# Altium PCB OSSI-1 Z Panel.PcbDoc
Units mil, origin at the board's own origin, x right, y up, seen from the top; angles counter-clockwise.
Board outline 3701 x 3701 mil, 2 copper layers (Top, Bottom), stack 61.811 mil thick; 41 components, 29 nets, 89 pads, 17 vias.
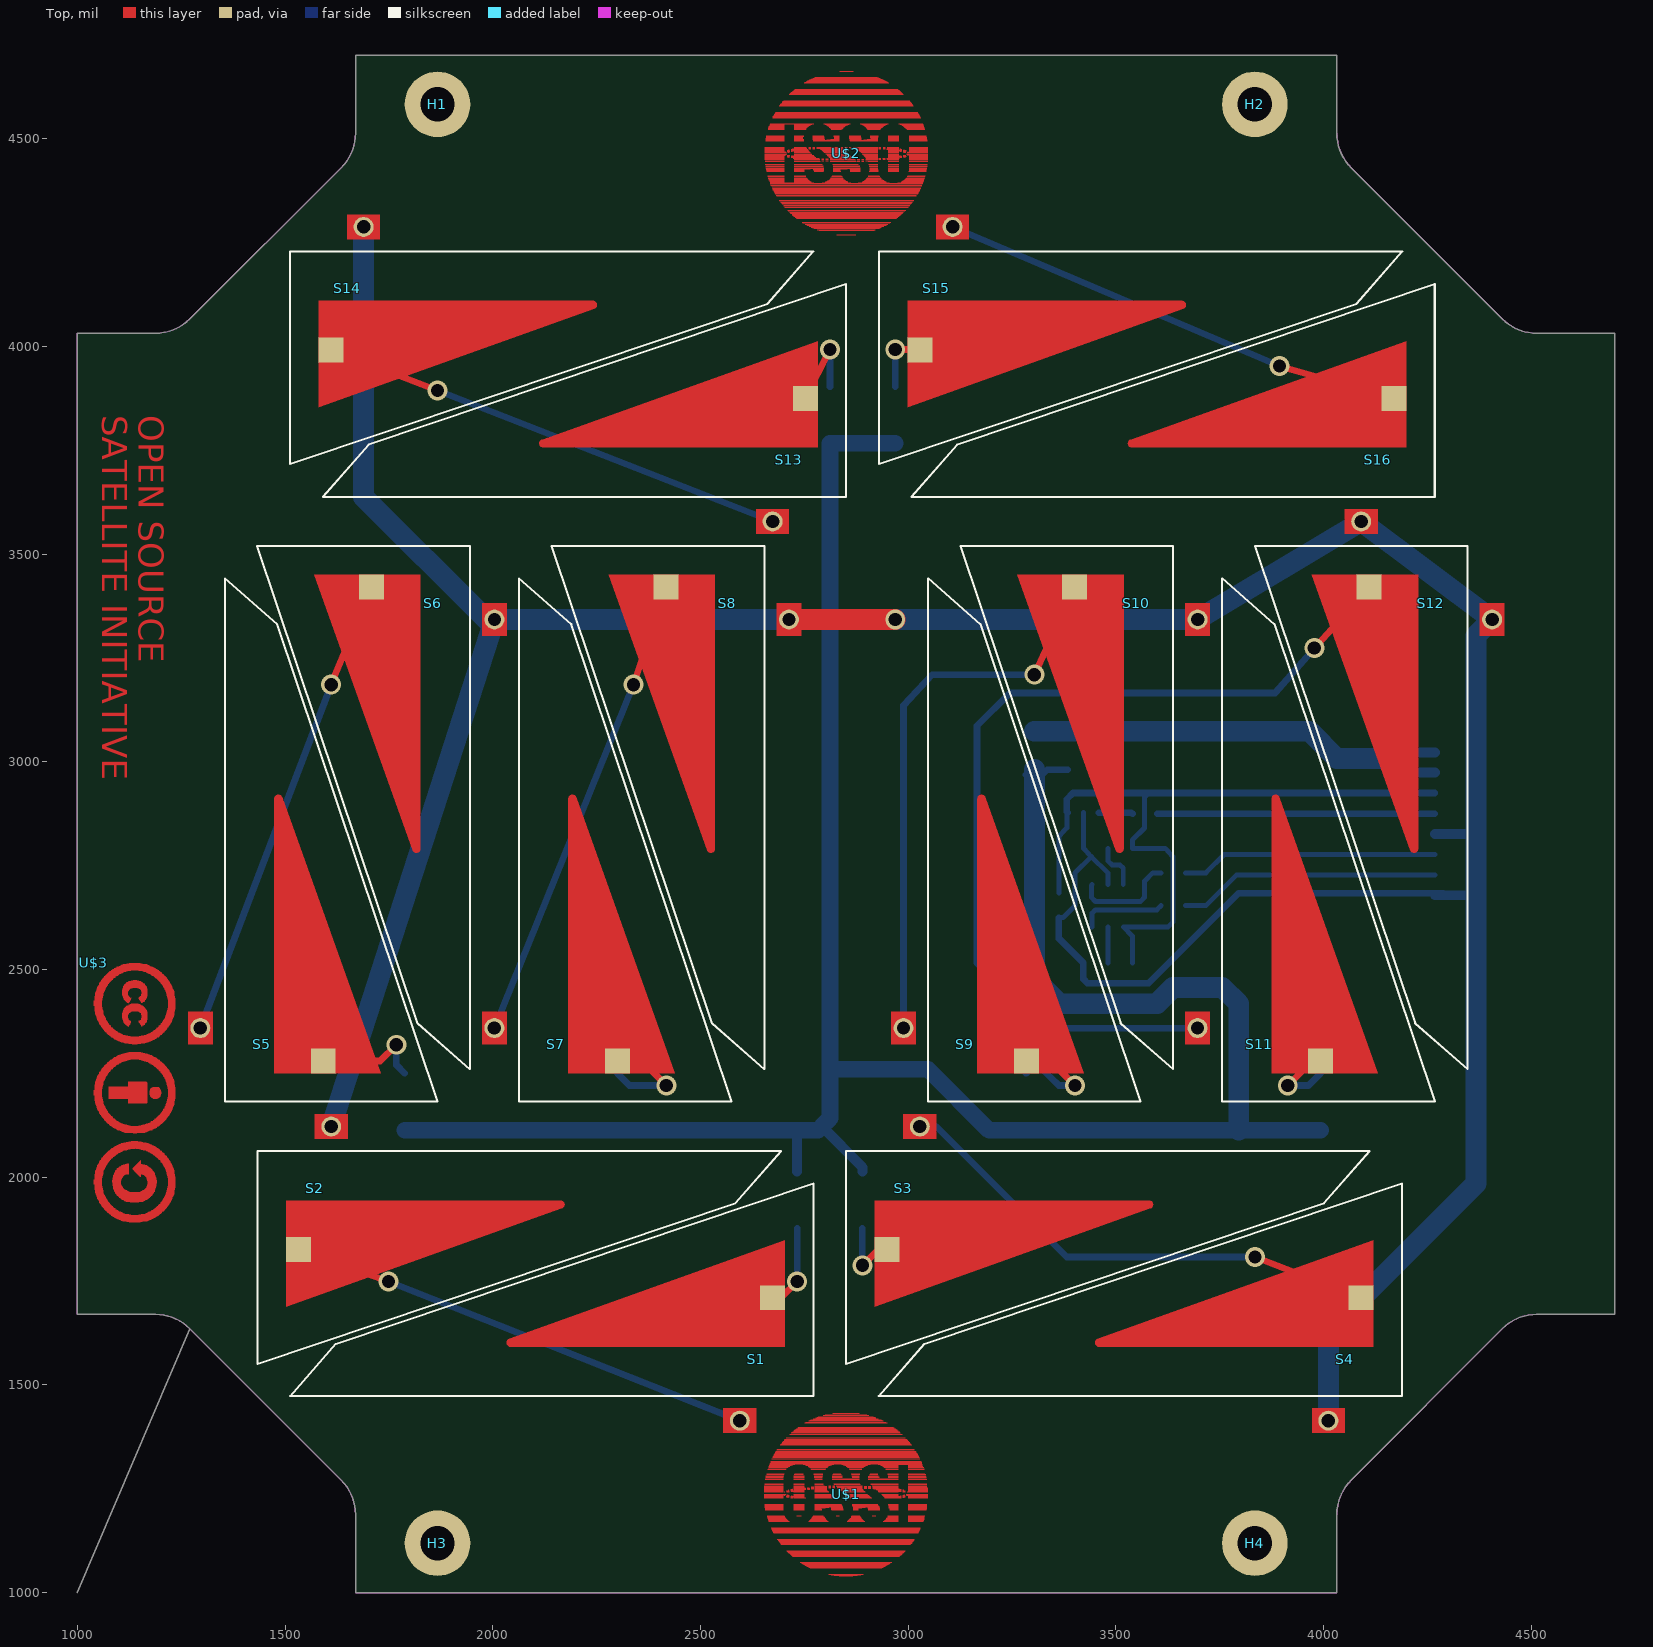
[diagram p0: Top view]
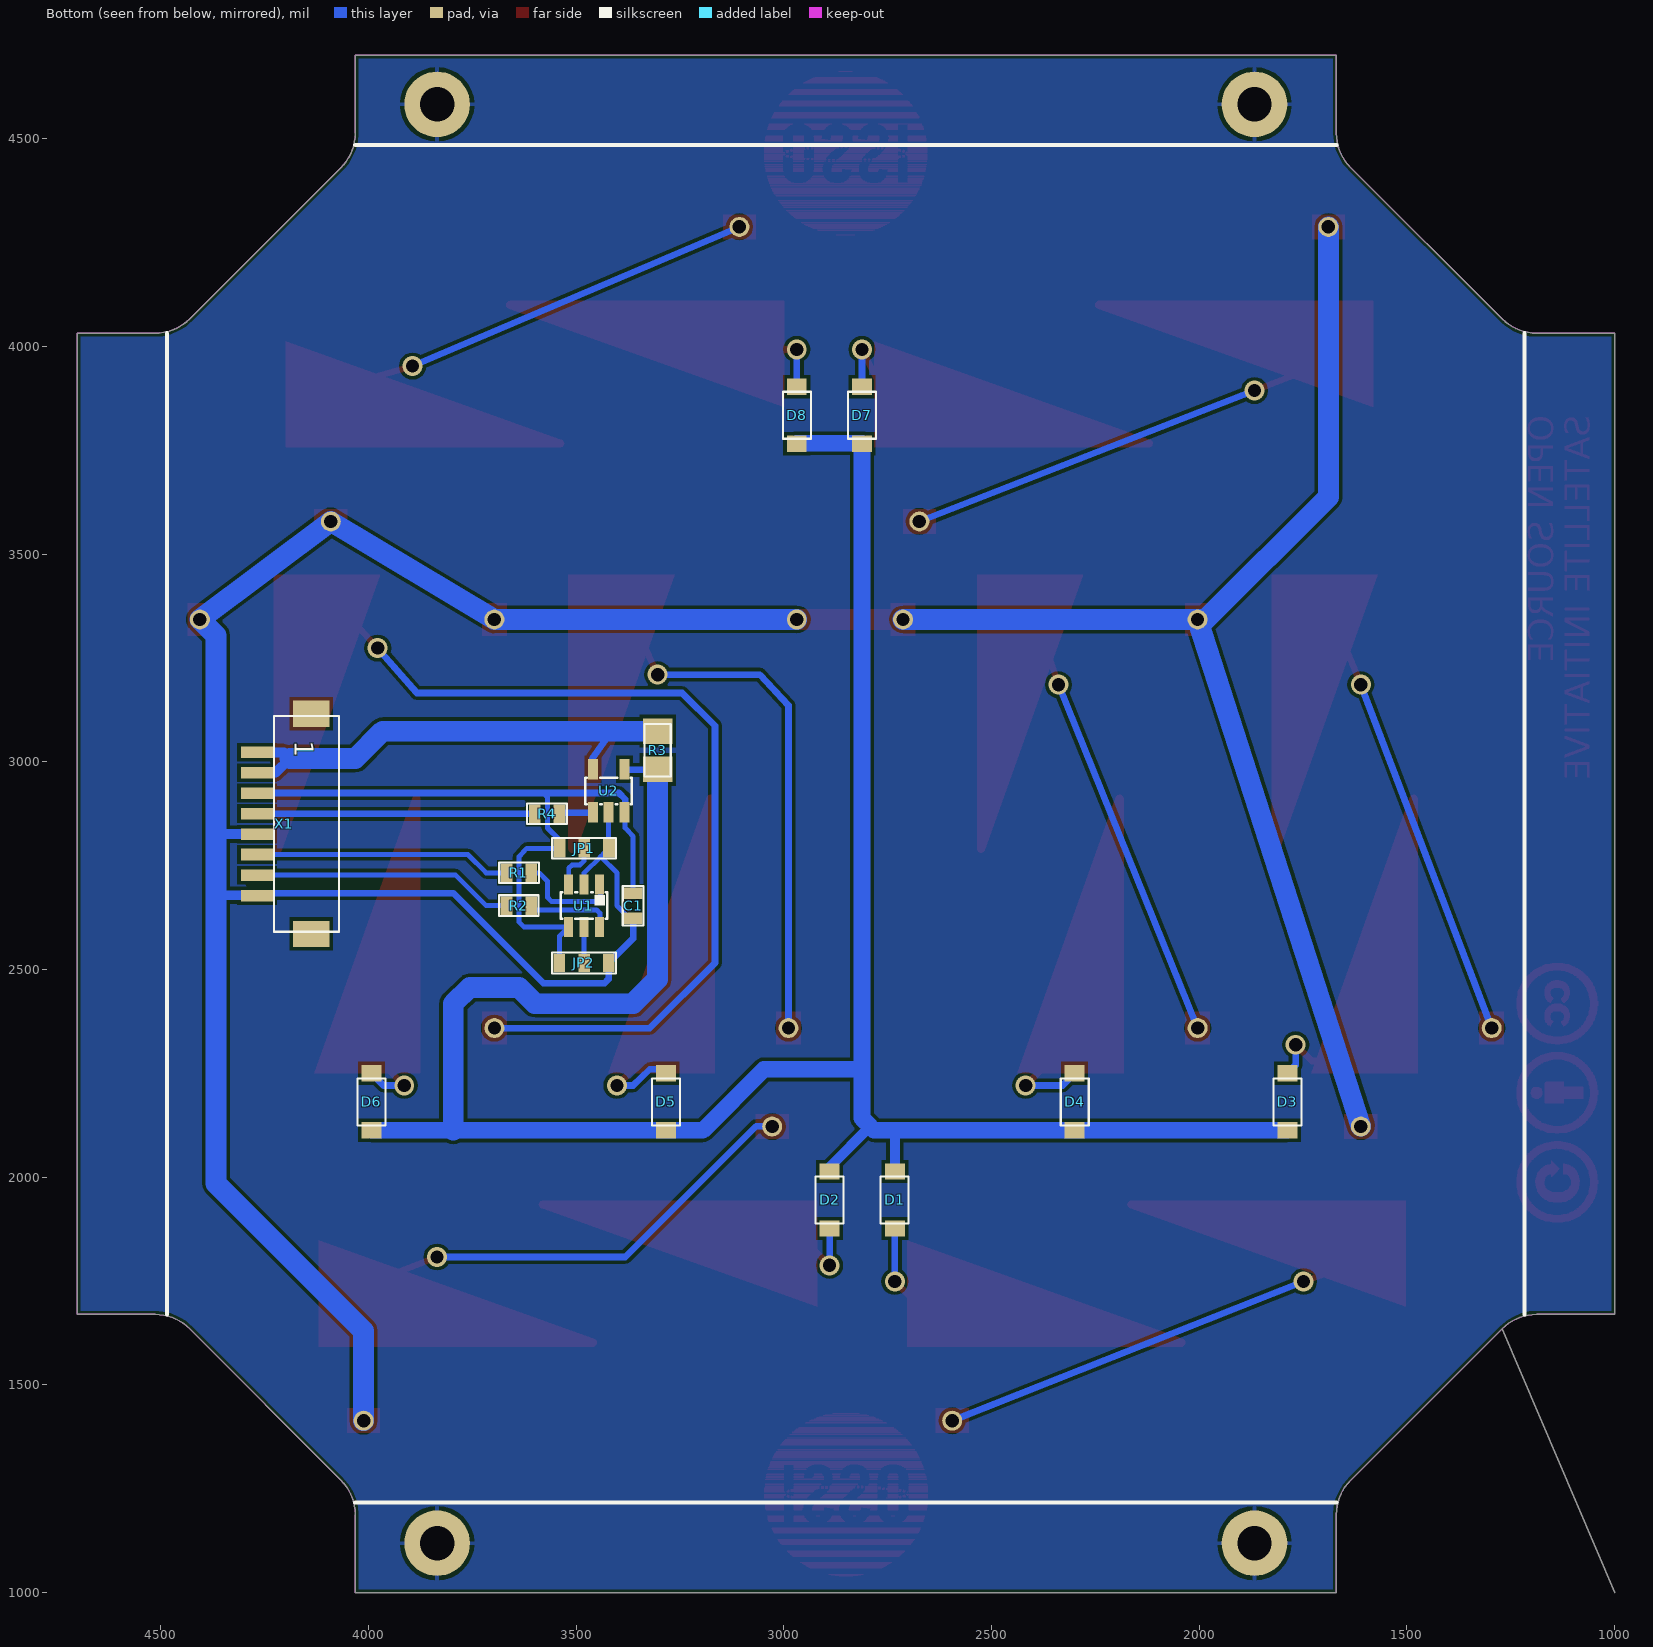
[diagram p1: Bottom view, seen from below]

## Layer stack, top to bottom
Top Solder: solder mask 0.4, Solder Resist, Dk 3.5
Top: signal copper 1.378
Dielectric 1: core 59.0551, FR-4, Dk 4.8
Bottom: signal copper 1.378
Bottom Solder: solder mask 0.4, Solder Resist, Dk 3.5

## Board outline
1271,1635 1635,1271 cw(c1552.31,1187.25) 1670,1188 1670,1000 4032,1000 4032,1188 cw(c4149.69,1187.25) 4067,1271 4430,1635 cw(c4514.25,1551.1) 4514,1670 4701,1670 4701,4032 4514,4032 cw(c4514.25,4150.9) 4430,4067 4067,4430 cw(c4150.9,4514.25) 4032,4514 4032,4701 1670,4701 1670,4514 cw(c1551.1,4514.25) 1635,4430 1271,4067 cw(c1187.25,4149.69) 1188,4032 1000,4032 1000,1670 1188,1670 cw(c1187.25,1552.31) 1000,1000

## Design rules (kind name [scope] priority, off if disabled: settings)
Clearance mdViaVia [IsVia vs IsVia] p1: gap=8
Clearance mdPadVia [IsPad vs IsVia] p2: gap=8
Clearance mdPadPad [IsPad vs IsPad] p3: gap=8
Clearance mdWireVia [(InLayerClass('Signal Layers') AND IsTrack) vs IsVia] p4: gap=8
Clearance mdWirePad [(InLayerClass('Signal Layers') AND IsTrack) vs IsPad] p5: gap=8
Clearance mdWireWire [(InLayerClass('Signal Layers') AND IsTrack) vs (InLayerClass('Signal Layers') AND IsTrack)] p6: gap=8
Clearance [All] p7: gap=8
HoleSize [All] p1: absolutevalues=TRUE maxlimit=100000 minlimit=24 maxpercent=80.000 minpercent=20.000
HoleToHoleClearance [All] p1: gap=8 allowstackedmicrovias=TRUE
PolygonConnect ThermalVias [IsVia] p1: connectstyle=Direct reliefconductorwidth=10 reliefentries=4 polygonreliefangle="90 Angle" airgapwidth=10
PolygonConnect [All] p2: connectstyle=Relief reliefconductorwidth=10 reliefentries=4 polygonreliefangle="90 Angle" airgapwidth=10
RoutingVias [All] p1: holewidth=28 width=50 viastyle="Through Hole" minholewidth=28 minwidth=50 maxholewidth=28 maxwidth=50
SilkToSilkClearance [All] p1 off: silktosilkclearance=10
SilkToSolderMaskClearance [IsPad] p1 off: minsilkscreentomaskgap=10 clearancetoexposedcopper=TRUE
SolderMaskExpansion [All] p1: expansion=4
Width [All] p1: maxlimit=100000 minlimit=10 preferedwidth=10
26 further rules are at their usual default settings.

## Components (designator, comment, footprint, x,y, rotation, side; value= is the part's Value field where it differs from the comment)
C1 "100nF" C0603(1608) 3363,2654 r270 bottom
D1 "STPS0520Z" SOD-123 2733,1945 r90 bottom
D2 "STPS0520Z" SOD-123 2890,1945 r90 bottom
D3 "STPS0520Z" SOD-123 1788,2182 r270 bottom
D4 "STPS0520Z" SOD-123 2300,2182 r270 bottom
D5 "STPS0520Z" SOD-123 3284,2182 r270 bottom
D6 "STPS0520Z" SOD-123 3993,2182 r270 bottom
D7 "STPS0520Z" SOD-123 2812,3835 r270 bottom
D8 "STPS0520Z" SOD-123 2969,3835 r270 bottom
H1 "" 2.1-PAD-ROUND 1867,4583 r0 top
H2 "" 2.1-PAD-ROUND 3835,4583 r0 top
H3 "" 2.1-PAD-ROUND 1867,1119 r0 top
H4 "" 2.1-PAD-ROUND 3835,1119 r0 top
JP1 "" JP2SMD0603 3481,2792 r180 bottom
JP2 "" JP2SMD0603 3481,2516 r0 bottom
R1 "250" R0603(1608) 3638,2733 r180 bottom
R2 "250" R0603(1608) 3638,2654 r0 bottom
R3 "50m" WSL1206 3304,3028 r90 bottom
R4 "1k" R0603(1608) 3570,2875 r0 bottom
S1 "TASCSOLARCELL" TASCSOLARCELL 2772,1473 r0 top
S2 "TASCSOLARCELL" TASCSOLARCELL 1434,2063 r180 top
S3 "TASCSOLARCELL" TASCSOLARCELL 2851,2063 r180 top
S4 "TASCSOLARCELL" TASCSOLARCELL 4189,1473 r0 top
S5 "TASCSOLARCELL" TASCSOLARCELL 1355,2182 r270 top
S6 "TASCSOLARCELL" TASCSOLARCELL 1945,3520 r90 top
S7 "TASCSOLARCELL" TASCSOLARCELL 2063,2182 r270 top
S8 "TASCSOLARCELL" TASCSOLARCELL 2654,3520 r90 top
S9 "TASCSOLARCELL" TASCSOLARCELL 3048,2182 r270 top
S10 "TASCSOLARCELL" TASCSOLARCELL 3638,3520 r90 top
S11 "TASCSOLARCELL" TASCSOLARCELL 3756,2182 r270 top
S12 "TASCSOLARCELL" TASCSOLARCELL 4347,3520 r90 top
S13 "TASCSOLARCELL" TASCSOLARCELL 2851,3638 r0 top
S14 "TASCSOLARCELL" TASCSOLARCELL 1512,4229 r180 top
S15 "TASCSOLARCELL" TASCSOLARCELL 2930,4229 r180 top
S16 "TASCSOLARCELL" TASCSOLARCELL 4268,3638 r0 top
U1 "TMP100" SOT23-6DBV 3481,2654 r0 bottom
U2 "MAX4376" SOT23-5DBV 3422,2930 r180 bottom
U$1 "" OSSILOGO1010 2851,1237 r0 top
U$2 "" OSSILOGO1010 2851,4465 r180 top
U$3 "" CCLOGO 1040,2516 r270 top
X1 "DF13DF13A-8P-1.25H" DF13A-8P 4268,2851 r270 bottom

## Footprints (in the part's own frame and the unit in brackets; to place one, negate y for a bottom-side part, rotate by r counter-clockwise, add the part's x,y. Pads: shape width x height; smd on the part's side, far side on the other; paste and mask are expansions set on the pad)
2.1-PAD-ROUND [mil] "2.1-PAD-ROUND"
  round 158 hole 83: B3,2(0,0)
C0603(1608) [mil] "C0603(1608)"
  rect 28x44 smd: 1(-29.53,0) 2(30,0)
  silkscreen extent -47,-25 48,25
CCLOGO [mil] "CCLOGO"
  Top drawing of 1500 lines, arcs and shapes, not listed
DF13A-8P [mil] "DF13A-8P"
  rect 28x79 smd: 1(-172.24,0) 2(-123.03,0) 3(-73.82,0) 4(-24.61,0) 5(25,0) 6(74,0) 7(124,0) 8(173,0)
  rect 63x87 smd: P$1(-264.76,130) P$2(265,130)
  silkscreen extent -260,40 260,197
JP2SMD0603 [mil] "JP2SMD0603"
  rect 28x44 smd: 1(-59.06,0) 2(0,0) 3(60,0)
  silkscreen extent -77,-25 77,25
OSSILOGO1010 [mil] "OSSILOGO1010"
  Top drawing of 1008 lines, arcs and shapes, not listed
R0603(1608) [mil] "R0603(1608)"
  rect 28x44 smd: 1(-29.53,0) 2(30,0)
  silkscreen extent -47,-25 48,25
SOD-123 [mil] "SOD-123"
  rect 39x48 smd: A(-68.31,0) C(69,0)
  silkscreen extent -56,-33 57,34
SOT23-5DBV [mil] "SOT23-5DBV"
  rect 24x49 smd: 1(-37.4,-51.18) 2(0,-51.18) 3(38,-51.18) 4(38,52) 5(-37.4,52)
  silkscreen extent -56,-32 56,32
SOT23-6DBV [mil] "SOT23-6DBV"
  rect 22x48 smd: 1(-37.4,-51.18) 2(0,-51.18) 3(38,-51.18) 4(38,52) 5(0,52) 6(-37.4,52)
  silkscreen extent -56,-32 56,32
TASCSOLARCELL [mil] "TASCSOLARCELL"
  round 48 hole 32: N(-177.17,-59.06)
  rect 60x60 smd: P(-98.43,237)
  Top region: -216.54,-88.58 -137.8,-88.58 -137.8,-29.53 -216.54,-29.53
  Top region: -68.9,119 -729.02,119 -733.43,120.03 -736.9,122.94 -738.7,127.1 -738.43,131.62 -736.15,135.53 -732.35,138 -732.35,138 -68.9,375
  silkscreen extent -1260,0 0,512
WSL1206 [mil] "WSL1206"
  rect 62x71 smd: P$1(-45.87,0) P$2(46,0)
  silkscreen extent -63,-31 63,32

## Part data
C1: library part C0603(1608)
D1 D2 D3 D4 D5 D6 D7 D8: library part SOD-123
H1 H2 H3 H4: library part 2.1-PAD-ROUND
JP1 JP2: library part JP2SMD0603
R1 R2 R4: library part R0603(1608)
R3: library part WSL1206
U1: library part SOT23-6DBV
U2: library part SOT23-5DBV
U$1 U$2: library part OSSILOGO1010
U$3: library part CCLOGO
X1: library part DF13A-8P

## Via types
v1: diameter 48/48 (per signal layer), hole 32, Top to Bottom, 17 vias

## Nets (pads, with @x,y where several pads share a name; then routed paths per layer and width w, separated by ;. In a path a pad name is that pad's centre, name@x,y a point inside that pad or via, vN(x,y) a via of type N, cw(c..) or ccw(c..) an arc to the next point about the centre after c; other vN are vias at no path point)
3.3VOBC: C1.1 JP1.1 JP2.3 U1.4 U2.3 X1.3 | length 1761.3
  Bottom w12: C1.1@3363,2684 3363,2821 3382,2841 3382,2876 U2.3@3384,2878 ; JP2.3@3540,2516 3540,2581 3518,2603 3626,2603 3638,2615 3638,2772 3619,2792 3540,2792 3540,2812 3569,2841 3569,2915 3579,2925
  Bottom w16: U2.3@3384,2878 3382,2880 3382,2910 3397,2925 3579,2925 X1.3@4268,2925
CS: R4.2 X1.4 | length 668
  Bottom w16: R4.2 X1.4@4268,2875
GND: C1.2 JP1.3 JP2.1 S2.N S4.N S6.N S8.N S10.N S12.N S14.N S16.N U1.2 U2.2 X1.5 X1.8 | length 8732.4
  Top w50: S8.N@2713,3343 v1(2969,3343)
  Bottom w12: C1.2@3363,2625 3373,2625 3402,2654 3402,2733 3441,2772 ; U2.2@3422,2878 3422,2792 3441,2772 ; U1.2@3481,2705 3481,2733 3441,2772
  Bottom w16: C1.2@3363,2625 3363,2575 3422,2516 3422,2477 3432,2467 3579,2467 3796,2684 4288,2684 X1.8@4288,2679
  Bottom w24: X1.8@4268,2679 4288,2679 4362,2679 4367,2674 ; X1.5 4352,2826 4367,2812
  Bottom w50: S2.N@1611,2123 S6.N@2004,3343 ; S14.N@1689,4288 1689,3638 1985,3343 S6.N@2004,3343 ; S8.N@2713,3343 S6.N@2004,3343 ; v1(2969,3343) 3697,3343 4091,3579 4406,3343 4367,3304 4367,2812 4367,2674 4367,1985 4012,1630 S4.N@4012,1414
N$1: S1.N S2.P | length 1140.5
  Top w16: S2.P@1532,1827 v1(1749,1749)
  Bottom w16: v1(1749,1749) S1.N@2595,1414
N$2: D1.A S1.P | length 203.6
  Top w16: S1.P@2674,1709 2693,1709 v1(2733,1749)
  Bottom w16: v1(2733,1749) D1.A@2733,1877
N$3: S3.N S4.P | length 1212
  Top w16: v1(3835,1808) S4.P@4091,1709
  Bottom w16: S3.N@3028,2123 3067,2123 3382,1808 v1(3835,1808)
N$4: D2.A S3.P | length 163.9
  Top w16: v1(2890,1788) 2930,1827 S3.P@2949,1827
  Bottom w16: v1(2890,1788) D2.A@2890,1877
N$5: S5.N S6.P | length 1140.5
  Top w16: v1(1611,3186) S6.P@1709,3422
  Bottom w16: S5.N@1296,2359 v1(1611,3186)
N$6: D3.A S5.P | length 270.4
  Top w16: S5.P@1591,2280 1729,2280 v1(1768,2319)
  Bottom w16: v1(1768,2319) 1768,2270 D3.A@1788,2250
N$7: S7.N S8.P | length 1141.1
  Top w16: v1(2339,3186) S8.P@2418,3422
  Bottom w16: S7.N@2004,2359 v1(2339,3186)
N$8: D4.A S7.P | length 272.5
  Top w16: S7.P@2300,2280 2359,2280 v1(2418,2221)
  Bottom w16: D4.A@2300,2250 2329,2221 v1(2418,2221)
N$9: S9.N S10.P | length 1357.7
  Top w16: v1(3304,3210) S10.P@3402,3422
  Bottom w16: S9.N@2989,2359 2989,3136 3058,3210 v1(3304,3210)
N$10: D5.A S9.P | length 280.4
  Top w16: S9.P@3284,2280 3343,2280 v1(3402,2221)
  Bottom w16: D5.A@3284,2250 3294,2260 3323,2260 3363,2221 v1(3402,2221)
N$11: S11.N S12.P | length 2259.9
  Top w16: v1(3978,3274) S12.P@4111,3422
  Bottom w16: S11.N@3697,2359 3323,2359 3166,2516 3166,3087 3245,3166 3884,3166 v1(3978,3274)
N$12: D6.A S11.P | length 194.5
  Top w16: v1(3914,2221) 3973,2280 S11.P@3993,2280
  Bottom w16: v1(3914,2221) 3964,2221 D6.A@3993,2250
N$13: S13.N S14.P | length 1140.8
  Top w16: S14.P@1611,3993 v1(1867,3894)
  Bottom w16: v1(1867,3894) S13.N@2674,3579
N$14: D7.A S13.P | length 222.4
  Top w16: S13.P@2752,3875 v1(2812,3993)
  Bottom w16: D7.A@2812,3903 v1(2812,3993)
N$15: S15.N S16.P | length 1142.1
  Top w16: v1(3894,3953) S16.P@4170,3875
  Bottom w16: S15.N@3107,4288 v1(3894,3953)
N$16: D8.A S15.P | length 149
  Top w16: v1(2969,3993) S15.P@3028,3993
  Bottom w16: D8.A@2969,3903 v1(2969,3993)
N$25: R1.2 U1.1 | length 255.7
  Bottom w12: U1.1@3443,2705 3441,2703 3441,2674 3451,2664 3560,2664 3569,2674 3569,2713 3589,2733 R1.2@3609,2733
N$26: R2.1 U1.6 | length 206.5
  Bottom w12: U1.6@3443,2603 3443,2636 3451,2644 3599,2644 R2.1@3609,2654
N$27: D1.C D2.C D3.C D4.C D5.C D6.C D7.C D8.C R3.P$1 U2.4 | length 5796
  Bottom w16: R3.P$1@3284,2969 R3.P$1@3323,2969 ; R3.P$1@3304,2982 3310,2982 R3.P$1@3323,2969 ; U2.4@3384,2981 3335,2981 R3.P$1@3323,2969
  Bottom w24: D1.C 2733,2113 ; 2783,2113 2792,2123 2890,2024 D2.C
  Bottom w40: D3.C D4.C 2733,2113 2783,2113 ; 2792,2123 2812,2142 2812,2260 ; D8.C@2969,3767 2812,3767 2812,2260 ; D6.C 3796,2113 D5.C 3195,2113 3048,2260 2812,2260
  Bottom w50: R3.P$1@3304,2982 3304,2477 3363,2418 3599,2418 3638,2457 3756,2457 3796,2418 3796,2113
N$28: JP1.2 U1.3 | length 113.8
  Bottom w12: JP1.2 3481,2762 3491,2752 3510,2752 3518,2745 U1.3@3518,2705
N$29: JP2.2 U1.5 | length 87
  Bottom w12: JP2.2 U1.5@3481,2603
N$30: R4.1 U2.1 | length 83
  Bottom w16: U2.1@3459,2878 3537,2878 R4.1@3541,2875
PANELTEMP_SCL: R1.1 X1.6 | length 618.2
  Bottom w12: R1.1@3668,2733 3717,2733 3761,2777 X1.6
PANELTEMP_SDA: R2.2 X1.7 | length 630.7
  Bottom w12: R2.2 3717,2654 3791,2728 X1.7@4268,2728
STRUT_GND: H1.B3,2 H2.B3,2 H3.B3,2 H4.B3,2
VSOLAR: R3.P$2 U2.5 X1.1 X1.2 | length 1309.6
  Bottom w16: R3.P$2 3415,3074 3461,3008 3461,2983 U2.5@3459,2981
  Bottom w24: X1.2 4224,2974 4189,3008 4204,3023 X1.1@4268,3023
  Bottom w50: R3.P$2 3966,3074 4032,3008 4189,3008
pads on no net: X1.P$1 X1.P$2

## Polygon pours and split planes (outlines as drawn)
STRUT_GND on Bottom "Bottom-STRUT_GND" (solid, remove dead copper, pour order 2): 1662,4709 1662,4507.32 1193.69,4040 992,4040 992,1662 1193.69,1662 1662,1193.69 1662,992 4040,992 4040,1193.69 4507.32,1662 4709,1662 4709,4040 4507.31,4040 4040,4507.31 4040,4709

## Keep-outs
Keep-Out Layer:
  lines w0: 1000,1670 1000,4032 1188,4032 ccw(c1187.25,4149.69) 1271,4067 1635,4430 ccw(c1551.1,4514.25) 1670,4514 1670,4701 4032,4701 4032,4514 ccw(c4150.9,4514.25) 4067,4430 4430,4067 ccw(c4514.25,4150.9) 4514,4032 4701,4032 4701,1670 4514,1670 ccw(c4514.25,1551.1) 4430,1635 4067,1271 ccw(c4149.69,1187.25) 4032,1188 4032,1000 1670,1000 1670,1188 ccw(c1552.31,1187.25) 1635,1271 1271,1635 ccw(c1187.25,1552.31) 1188,1670 1000,1670

## Other copper
Top:
  text "SATELLITE INITIATIVE" at 1060,3835 h59.5 r270
  text "OPEN SOURCE" at 1148,3835 h59.5 r270

## Silkscreen, mask and mechanical layers (free items; w line width, h text height)
Bottom Overlay:
  lines w10: 1217,1670 1217,4032 ; 1670,1217 4032,1217 ; 1670,4485 4032,4485 ; 4485,1670 4485,4032
Top Solder:
  text "SATELLITE INITIATIVE" at 1060,3835 h59.5 r270
  text "OPEN SOURCE" at 1148,3835 h59.5 r270
Dimension:
  lines w0: 1000,1670 1000,4032 1188,4032 ccw(c1187.25,4149.69) 1271,4067 1635,4430 ccw(c1551.1,4514.25) 1670,4514 1670,4701 4032,4701 4032,4514 ccw(c4150.9,4514.25) 4067,4430 4430,4067 ccw(c4514.25,4150.9) 4514,4032 4701,4032 4701,1670 4514,1670 ccw(c4514.25,1551.1) 4430,1635 4067,1271 ccw(c4149.69,1187.25) 4032,1188 4032,1000 1670,1000 1670,1188 ccw(c1552.31,1187.25) 1635,1271 1271,1635 ccw(c1187.25,1552.31) 1188,1670 1000,1670
bDocu:
  lines w16: 1256,4445 1256,4032 1000,4032 1000,4701 1670,4701 ; 1000,1000 1000,1670 1237,1670 1237,1237 1670,1237 1670,1000 1000,1000 ; 4091,1000 4091,1237 4465,1237 4465,1670 4701,1670 4701,1000 4091,1000 ; 4091,4445 4445,4445 4445,4032 4701,4032 4701,4701 4091,4701 4091,4445

## Text inside footprints (layer, text, board x,y; h text height)
C1: bNames ">NAME" at 3328,2689 h77.5 r90; bValues ">VALUE" at 3443,2689 h77.5 r90
D1: bNames ">NAME" at 2783,1820 h77.5 r270; bValues ">VALUE" at 2633,1820 h77.5 r270
D2: bNames ">NAME" at 2940,1820 h77.5 r270; bValues ">VALUE" at 2790,1820 h77.5 r270
D3: bNames ">NAME" at 1738,2307 h77.5 r90; bValues ">VALUE" at 1888,2307 h77.5 r90
D4: bNames ">NAME" at 2250,2307 h77.5 r90; bValues ">VALUE" at 2400,2307 h77.5 r90
D5: bNames ">NAME" at 3234,2307 h77.5 r90; bValues ">VALUE" at 3384,2307 h77.5 r90
D6: bNames ">NAME" at 3943,2307 h77.5 r90; bValues ">VALUE" at 4093,2307 h77.5 r90
D7: bNames ">NAME" at 2762,3960 h77.5 r90; bValues ">VALUE" at 2912,3960 h77.5 r90
D8: bNames ">NAME" at 2919,3960 h77.5 r90; bValues ">VALUE" at 3069,3960 h77.5 r90
JP1: bNames ">NAME" at 3381,2767 h77.5
JP2: bNames ">NAME" at 3581,2541 h77.5 r180
R1: bNames ">NAME" at 3673,2768 h77.5; bValues ">VALUE" at 3673,2653 h77.5
R2: bNames ">NAME" at 3603,2619 h77.5 r180; bValues ">VALUE" at 3603,2734 h77.5 r180
R3: bNames ">NAME" at 3354,2903 h77.5 r270; bValues ">VALUE" at 3204,2878 h77.5 r270
R4: bNames ">NAME" at 3535,2840 h77.5 r180; bValues ">VALUE" at 3535,2955 h77.5 r180
S1: tNames ">NAME" at 2812,1592 h77.5; tValues ">VALUE" at 2812,1513 h77.5
S2: tNames ">NAME" at 1394,1944 h77.5 r180; tValues ">VALUE" at 1394,2023 h77.5 r180
S3: tNames ">NAME" at 2811,1944 h77.5 r180; tValues ">VALUE" at 2811,2023 h77.5 r180
S4: tNames ">NAME" at 4229,1592 h77.5; tValues ">VALUE" at 4229,1513 h77.5
S5: tNames ">NAME" at 1474,2142 h77.5 r270; tValues ">VALUE" at 1395,2142 h77.5 r270
S6: tNames ">NAME" at 1826,3560 h77.5 r90; tValues ">VALUE" at 1905,3560 h77.5 r90
S7: tNames ">NAME" at 2182,2142 h77.5 r270; tValues ">VALUE" at 2103,2142 h77.5 r270
S8: tNames ">NAME" at 2535,3560 h77.5 r90; tValues ">VALUE" at 2614,3560 h77.5 r90
S9: tNames ">NAME" at 3167,2142 h77.5 r270; tValues ">VALUE" at 3088,2142 h77.5 r270
S10: tNames ">NAME" at 3519,3560 h77.5 r90; tValues ">VALUE" at 3598,3560 h77.5 r90
S11: tNames ">NAME" at 3875,2142 h77.5 r270; tValues ">VALUE" at 3796,2142 h77.5 r270
S12: tNames ">NAME" at 4228,3560 h77.5 r90; tValues ">VALUE" at 4307,3560 h77.5 r90
S13: tNames ">NAME" at 2891,3757 h77.5; tValues ">VALUE" at 2891,3678 h77.5
S14: tNames ">NAME" at 1472,4110 h77.5 r180; tValues ">VALUE" at 1472,4189 h77.5 r180
S15: tNames ">NAME" at 2890,4110 h77.5 r180; tValues ">VALUE" at 2890,4189 h77.5 r180
S16: tNames ">NAME" at 4308,3757 h77.5; tValues ">VALUE" at 4308,3678 h77.5
U1: bNames ">NAME" at 3406,2579 h77.5 r180; bValues ">VALUE" at 3406,2789 h77.5 r180
U2: bNames ">NAME" at 3497,3005 h77.5; bValues ">VALUE" at 3497,2795 h77.5
X1: bNames ">NAME" at 3992,3087.22 h77.5 r90; bValues ">VALUE" at 4046,3087.22 h77.5 r90; Bottom Overlay "1" at 4193,3051 h77.5 r90